# Altium PCB M2_Mosaic-G5_Smart.PcbDoc
Units mm, origin at the board's own origin, x right, y up, seen from the top; angles counter-clockwise.
Board outline 22 x 30 mm, 4 copper layers (Top Layer, Layer 1, Layer 2, Bottom Layer), stack 0.705 mm thick; 16 components, 40 nets, 185 pads, 161 vias.
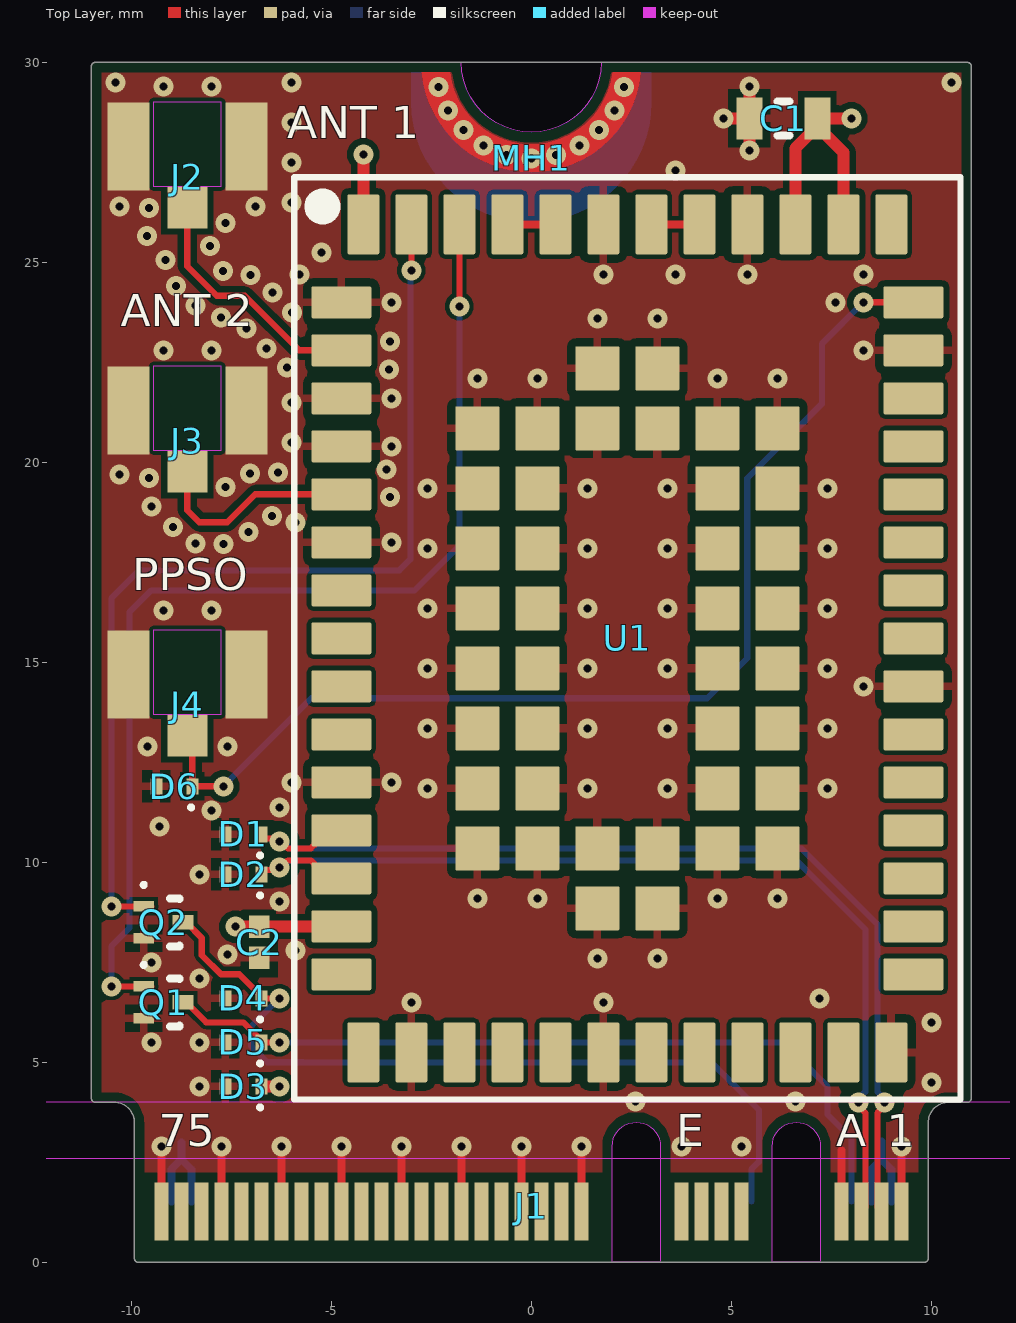
[diagram p0: Top Layer view]
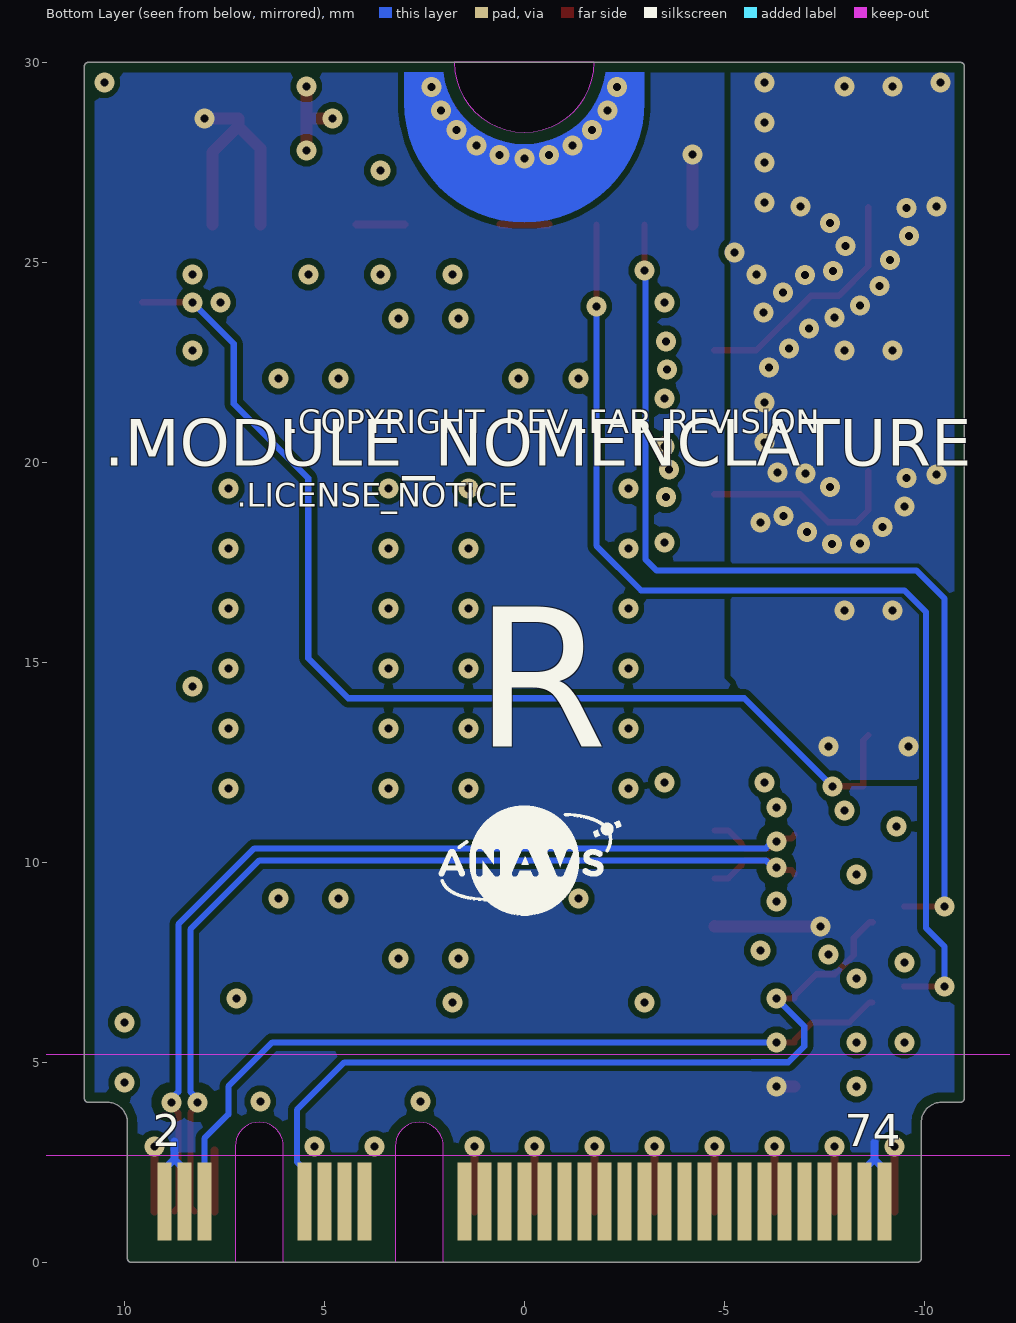
[diagram p1: Bottom Layer view, seen from below]
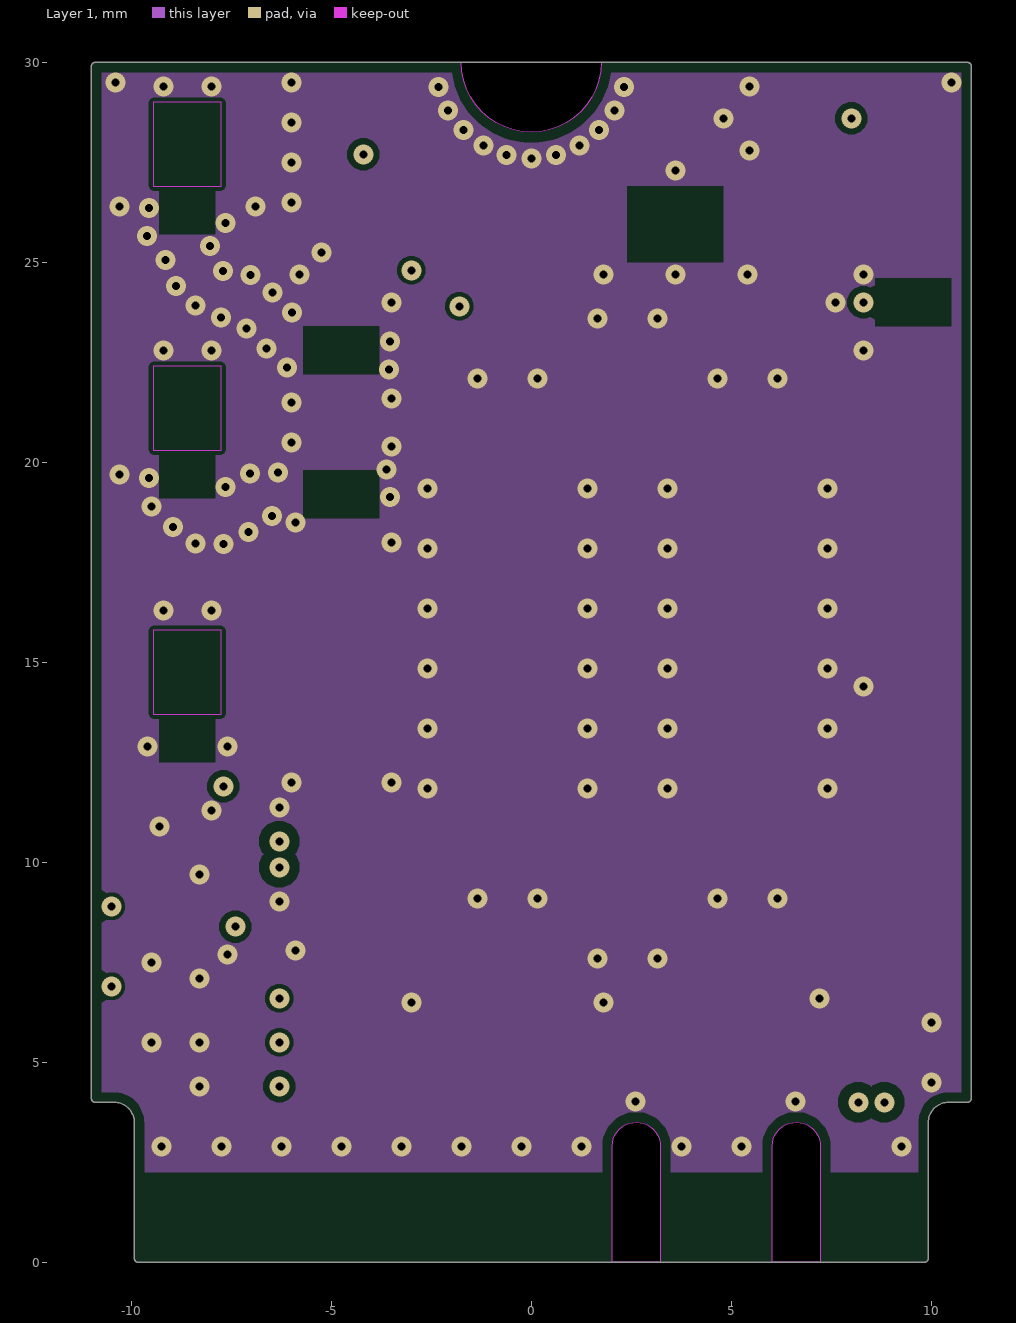
[diagram p2: Layer 1]
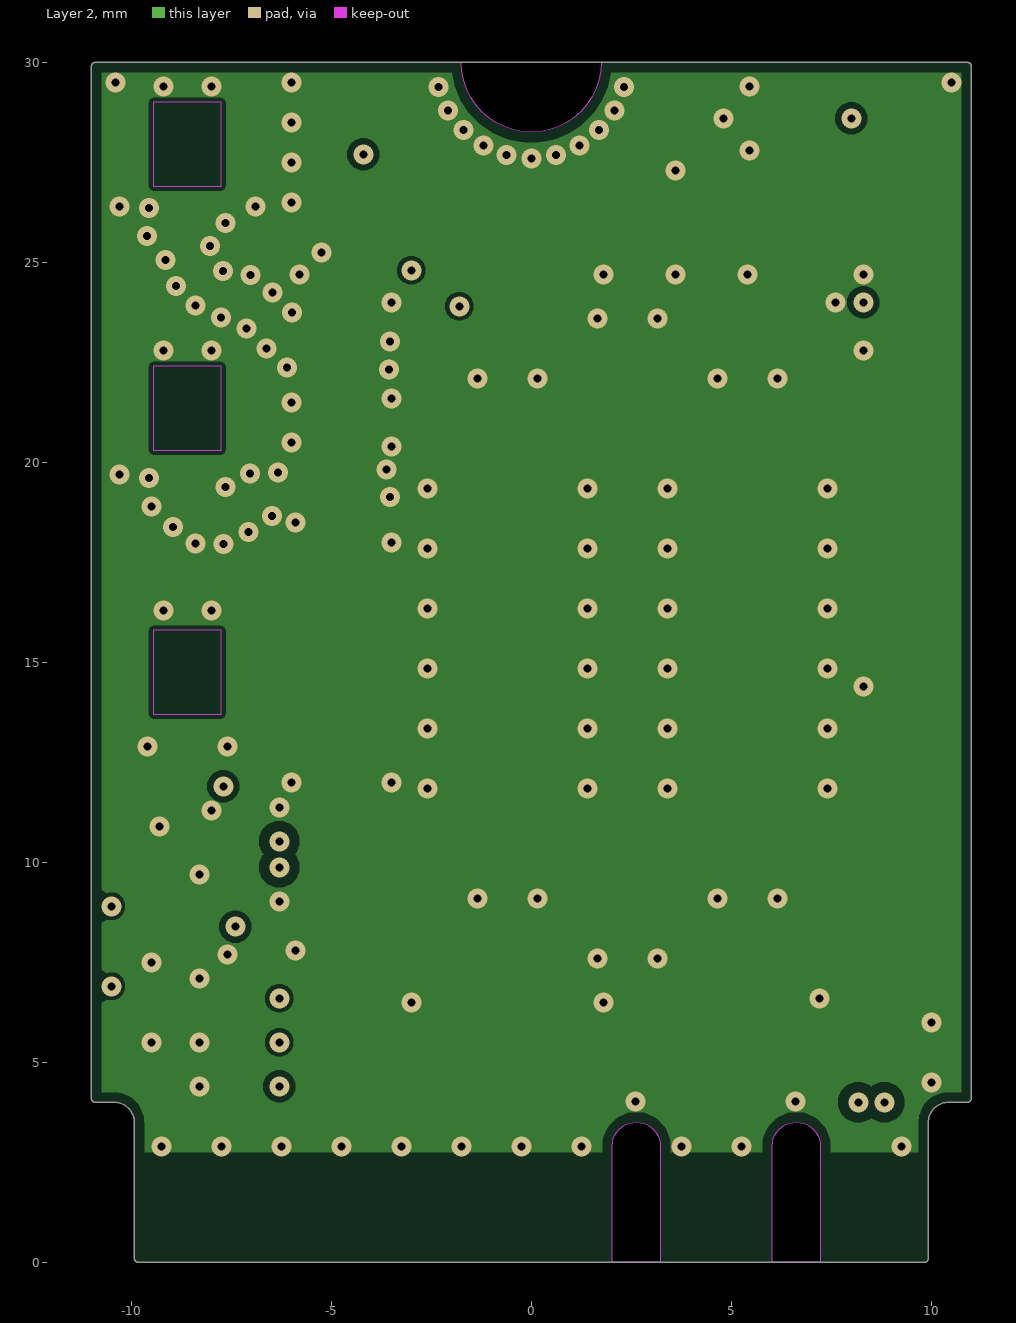
[diagram p3: Layer 2]
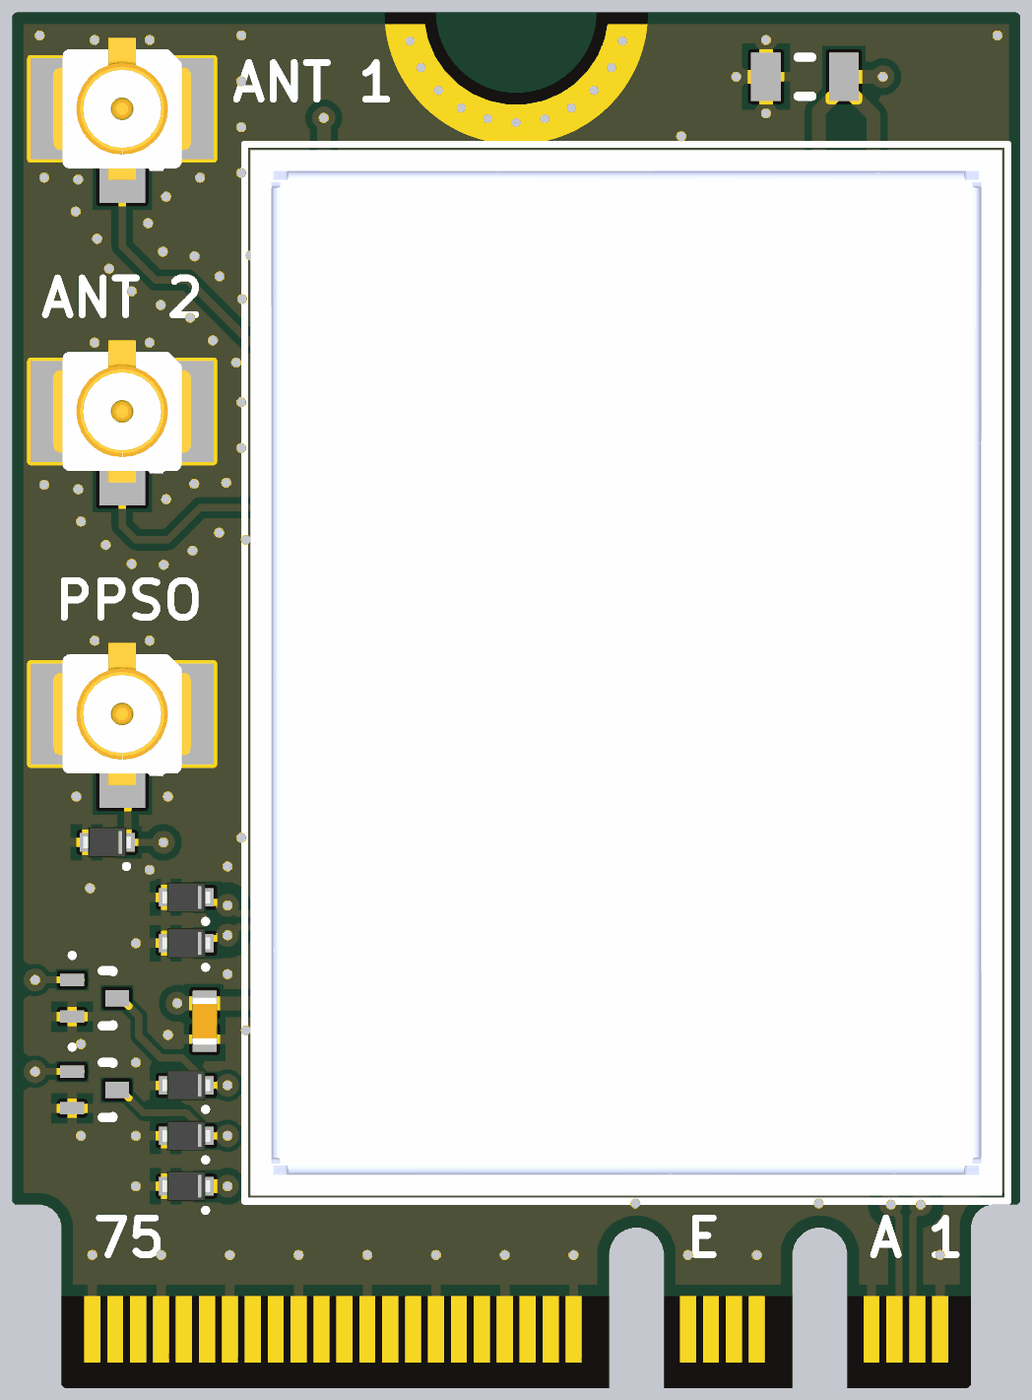
[diagram p4: 3D render of the assembled board from above, using the file's embedded part models]

## Layer stack, top to bottom
Top Solder: solder mask 0.04, Solder Resist, Dk 3.8
Top Layer: signal copper 0.036
Dielectric 2: prepreg 0.116, PP-006, Dk 4.2
Layer 1: signal copper 0.036
Dielectric 1: dielectric 0.329, FR-4, Dk 4.6
Layer 2: signal copper 0.036
Dielectric 3: prepreg 0.116, PP-006, Dk 4.2
Bottom Layer: signal copper 0.036
Bottom Solder: solder mask 0.04, Solder Resist, Dk 3.8

## Board outline
11,4.1 cw(c10.9,4.1) 10.9,4 10.425,4 ccw(c10.425,3.5) 9.925,3.5 9.925,0.1 cw(c9.825,0.1) 9.825,0 9.8,0 -9.825,0 cw(c-9.825,0.1) -9.925,0.1 -9.925,3.5 ccw(c-10.425,3.5) -10.425,4 -10.9,4 cw(c-10.9,4.1) -11,4.1 -11,29.9 cw(c-10.9,29.9) -10.9,30 10.9,30 cw(c10.9,29.9) 11,29.9

## Design rules (kind name [scope] priority, off if disabled: settings)
AssemblyTestPointUsage [All] p1 off:
AssemblyTestpoint [All] p1 off: testpointundercomponent=TRUE minsize=1.016 maxsize=2.54 preferedsize=1.524 minholesize=0 maxholesize=1.016 preferedholesize=0.813 testpointgrid=0.025 usegrid=TRUE gridtolerance=0 allowsidetop=TRUE allowsidebottom=TRUE
BoardOutlineClearance BoardOutlineClearance_1 [OnLayer('Top Overlay')] p1: gap=0 ignorepadtopadclearanceinfootprint=FALSE
BoardOutlineClearance [All] p2: gap=0.25 ignorepadtopadclearanceinfootprint=FALSE except(0: Arc-SplitContinuation Track-SplitContinuation SMDPad-SplitContinuation THPad-SplitContinuation Via-SplitContinuation Fill-SplitContinuation Poly-SplitContinuation Region-SplitContinuation Text-SplitContinuation)
Clearance Clearance_RF [InNetClass('RF')] p1: gap=0.15 ignorepadtopadclearanceinfootprint=FALSE
Clearance Clearance_DiffPairs [InNetClass('USB2.0')] p2: gap=0.15 ignorepadtopadclearanceinfootprint=FALSE except(0.14: SMDPad-SMDPad; 0.25: Via-Fill Via-Poly Via-Region) // USB2.0
Clearance Clearance_Power [InNetClass('Power')] p3: gap=0.15 ignorepadtopadclearanceinfootprint=FALSE except(0.14: SMDPad-SMDPad)
Clearance [All] p4: gap=0.1 ignorepadtopadclearanceinfootprint=FALSE
ComponentClearance [All] p1: gap=0.1 collisioncheckmode=3 verticalgap=0.2 showdistances=TRUE donotcheckwithout3dbody=TRUE
DiffPairsRouting DiffPairsRouting_USB2.0 [InDifferentialPair('USB')] p1: maxlimit=0.165 minlimit=0.15 mostfreqgap=0.165 toplayer_maxgap=0.15 toplayer_prefgap=0.15 toplayer_minwidth=0.15 toplayer_maxwidth=0.15 toplayer_prefwidth=0.15 bottomlayer_maxgap=0.15 bottomlayer_prefgap=0.15 bottomlayer_minwidth=0.15 bottomlayer_maxwidth=0.15 bottomlayer_prefwidth=0.15 impedanceprofiledriven=TRUE impedanceprofileid={B69DEC2E-AF19-444C-88DA-72D75EDAD83A} impedanceprofilevalue=90.000000 maxuncoupledlength=10
FabricationTestPointUsage [All] p1 off: valid=0 allowmultiple=FALSE
FabricationTestpoint [All] p1 off: side=3 testpointundercomponent=TRUE minsize=1.016 maxsize=2.54 preferedsize=1.524 minholesize=0 maxholesize=1.016 preferedholesize=0.813 testpointgrid=0.025 allowsidetop=TRUE allowsidebottom=TRUE usegrid=TRUE gridtolerance=0
Height Height_M2_Bottom [Layer = 'Bottom Layer'] p1: minheight=0 maxheight=1.3 prefheight=1
Height [All] p2: minheight=0 maxheight=25.4 prefheight=12.7
HoleSize [All] p1: absolutevalues=TRUE maxlimit=7 minlimit=0.1 maxpercent=80.000 minpercent=20.000
HoleToHoleClearance [All] p1: gap=0.2 allowstackedmicrovias=TRUE
MinimumAnnularRing [All] p1: minimumring=0.05
MinimumSolderMaskSliver [All] p1 off: minsoldermaskwidth=0.05
PlaneClearance [All] p1: clearance=0.35
PlaneConnect [All] p1: planeconnectstyle=Relief reliefexpansion=0.4 reliefentries=4 reliefconductorwidth=0.4 reliefairgap=0.2
PolygonConnect PolygonConnect_MH1 [HasFootprint('M.2 Mechanical Ground Pad Footprint')] p1: connectstyle=Direct reliefconductorwidth=0.254 reliefentries=4 polygonreliefangle="90 Angle" airgapwidth=0.254
PolygonConnect PolygonConnect_UMRF [(InComponent('J2') OR InComponent('J3') OR InComponent('J4'))] p2: connectstyle=Direct reliefconductorwidth=0.254 reliefentries=4 polygonreliefangle="90 Angle" airgapwidth=0.254
PolygonConnect [All] p3: thpad.connectstyle=Relief thpad.reliefconductorwidth=0.2 thpad.reliefentries=4 thpad.polygonreliefangle="45 Angle" thpad.airgapwidth=0.2 smdpad.connectstyle=Relief smdpad.reliefconductorwidth=0.2 smdpad.reliefentries=4 smdpad.polygonreliefangle="90 Angle" smdpad.airgapwidth=0.2 via.connectstyle=Direct via.reliefconductorwidth=0.2 via.reliefentries=4 via.polygonreliefangle="45 Angle" via.airgapwidth=0.2
ReturnPath [InNetClass('Antenna feed')] p1: impedanceprofileid={910BEB83-2EAD-482F-BD02-55335FFF49CD} _gaplimit=0
RoutingVias [All] p1: holewidth=0.15 width=0.25 viastyle="Through Hole" minholewidth=0.15 minwidth=0.25 maxholewidth=0.3 maxwidth=0.5
SilkToSilkClearance [All] p1 off: silktosilkclearance=0.02
SilkToSolderMaskClearance SilkToSolderMaskClearance_MH [HasFootprint('M.2 Mechanical Ground Pad Footprint')] p1: minsilkscreentomaskgap=0 clearancetoexposedcopper=TRUE
SilkToSolderMaskClearance SilkscreenOverComponentPads [IsPad] p2: minsilkscreentomaskgap=0.1 clearancetoexposedcopper=TRUE
SolderMaskExpansion SolderMaskExpansion_Tented [(ObjectKind = 'Via') And (AsMM(HoleDiameter) <= 0.2)] p1: expansion=0.102 istentingtop=TRUE
SolderMaskExpansion [All] p2: expansion=0.075 istentingtop=FALSE
UnRoutedNet [All] p1: checkbadconnections=TRUE
Width Width_RF_50R [InNetClass('RF')] p1: maxlimit=0.16 minlimit=0.127 preferedwidth=0.16 toplayer_minwidth=0.16 bottomlayer_minwidth=0.16 impedanceprofiledriven=TRUE impedanceprofileid={D78B447D-B8A2-4171-B246-AE72857CA4C4} impedanceprofilevalue=50.000000 minimp=50.000000 maximp=50.000000 favimp=50.000000
Width Width_Power [InNetClass('Power')] p2: maxlimit=2 minlimit=0.2 preferedwidth=0.45
Width [All] p3: maxlimit=2 minlimit=0.1 preferedwidth=0.2
15 further rules are at their usual default settings.

## Classes and differential pairs
component class Cover_Page: UF1
net class RF: NetD6_1 NetJ2_1 NetJ3_1
net class USB2.0: USB_N USB_P
component class Mosaic-G5: C1 C2 D6 J2 J3 J4 U1
net class Power: +3.3V
component class M.2_Key_A+E_Card: D1 D2 D3 D4 D5 J1 MH1 Q1 Q2
differential pair USB: +USB_P -USB_N

## Components (designator, comment, footprint, x,y, rotation, side; value= is the part's Value field where it differs from the comment)
C1 "C1608X5R0J226M080AC" CAPC1608X100X20ML10 6.3,28.6 r0 top value=22uF
C2 "GCM155R71H104KE02D" CAP0402C -6.8,8 r90 top
D1 "ESD9R3.3ST5G" ONSC-SOD-923-2-514AB-01_V -7.2,10.7 r180 top value=0.9pF
D2 "ESD9R3.3ST5G" ONSC-SOD-923-2-514AB-01_V -7.2,9.7 r180 top value=0.9pF
D3 "ESD9R3.3ST5G" ONSC-SOD-923-2-514AB-01_V -7.2,4.4 r180 top value=0.9pF
D4 "ESD9R3.3ST5G" ONSC-SOD-923-2-514AB-01_V -7.2,6.6 r180 top value=0.9pF
D5 "ESD9R3.3ST5G" ONSC-SOD-923-2-514AB-01_V -7.2,5.5 r180 top value=0.9pF
D6 "ESD9R3.3ST5G" ONSC-SOD-923-2-514AB-01_V -8.925,11.9 r180 top value=0.9pF
J1 "M.2 Dual Key A+E" "M.2 Key A+E card-Footprint" 0,0 r0 top locked
J2 "636101112001" 63610111x001 -8.6,27.9 r0 top
J3 "636101112001" 63610111x001 -8.6,21.3 r0 top
J4 "636101112001" 63610111x001 -8.6,14.7 r0 top
MH1 "M.2 Mechanical Ground Pad" "M.2 Mechanical Ground Pad Footprint" 0,30 r0 top locked
Q1 "NTK3043NT1G" ONSC-SOT-723-3-631AA-01_V -9.2,6.5 r0 top
Q2 "NTK3043NT1G" ONSC-SOT-723-3-631AA-01_V -9.2,8.5 r0 top
U1 "mosaic-G5-GENERIC" mosaic-G5-GENERIC-Footprint 2.4,15.6 r0 top

## Footprints (in the part's own frame and the unit in brackets; to place one, negate y for a bottom-side part, rotate by r counter-clockwise, add the part's x,y. Pads: shape width x height; smd on the part's side, far side on the other; paste and mask are expansions set on the pad)
63610111x001 [mm] "RF CONNECTOR VERTICAL 1.25MM"
  rect 1x1.05 smd: 1(0,-1.525)
  rect 1.05x2.2 smd: 2(-1.475,0) 3(1.475,0)
  body extent -1.5,-1.55 1.5,1.55, height 1.25
CAP0402C [mm] "Chip Capacitor, 2-Leads, Body 1,00x0,50mm, IPC High Density"
  rect 0.56x0.52 smd: 1(-0.39,0) 2(0.39,0)
  body extent -0.53,-0.28 0.53,0.28, height 0.55
CAPC1608X100X20ML10 [mm] "Chip Capacitor, 2-Leads, Body 1.70x0.90mm, IPC Low Density"
  rect 0.65x1.05 smd: 1(-0.85,0) 2(0.85,0)
  silkscreen extent -0.15,-0.43 0.15,0.43, body extent -0.85,-0.45 0.85,0.45, height 1
"M.2 Key A+E card-Footprint" [mm]
  rect 0.35x1.45 smd paste-20 mask+0: 1(9.25,1.275) 3(8.75,1.275) 5(8.25,1.275) 7(7.75,1.275) 17(5.25,1.275) 19(4.75,1.275) 21(4.25,1.275) 23(3.75,1.275) 33(1.25,1.275) 35(0.75,1.275) 37(0.25,1.275) 39(-0.25,1.275) 41(-0.75,1.275) 43(-1.25,1.275) 45(-1.75,1.275) 47(-2.25,1.275) 49(-2.75,1.275) 51(-3.25,1.275) 53(-3.75,1.275) 55(-4.25,1.275) 57(-4.75,1.275) 59(-5.25,1.275) 61(-5.75,1.275) 63(-6.25,1.275) 65(-6.75,1.275) 67(-7.25,1.275) 69(-7.75,1.275) 71(-8.25,1.275) 73(-8.75,1.275) 75(-9.25,1.275)
  rect 0.35x1.95 smd far side paste-20 mask+0: 2(9,1.525) 4(8.5,1.525) 6(8,1.525) 16(5.5,1.525) 18(5,1.525) 20(4.5,1.525) 22(4,1.525) 32(1.5,1.525) 34(1,1.525) 36(0.5,1.525) 38(0,1.525) 40(-0.5,1.525) 42(-1,1.525) 44(-1.5,1.525) 46(-2,1.525) 48(-2.5,1.525) 50(-3,1.525) 52(-3.5,1.525) 54(-4,1.525) 56(-4.5,1.525) 58(-5,1.525) 60(-5.5,1.525) 62(-6,1.525) 64(-6.5,1.525) 66(-7,1.525) 68(-7.5,1.525) 70(-8,1.525) 72(-8.5,1.525) 74(-9,1.525)
  Top Layer keep-out region: -15.005,2.6 14.995,2.6 14.995,4 -15.005,4
  Bottom Layer keep-out region: -15.005,2.67 14.995,2.67 14.995,5.2 -15.005,5.2
  Keep-Out Layer board cut-out: 2.025,0 2.025,2.9 2.071,3.13 2.201,3.324 2.395,3.454 2.625,3.5 2.625,3.5 2.855,3.454 3.049,3.324 3.179,3.13 3.225,2.9 3.225,2.9 3.225,0
  Keep-Out Layer board cut-out: 6.025,0 6.025,2.9 6.071,3.13 6.201,3.324 6.395,3.454 6.625,3.5 6.625,3.5 6.855,3.454 7.049,3.324 7.179,3.13 7.225,2.9 7.225,2.9 7.225,0
"M.2 Mechanical Ground Pad Footprint" [mil]
  round 1 smd: 0(0,-94.49)
  Top Layer region: 107.79,-9.84 79.98,-9.84 66.24,-45.83 37.39,-71.36 0,-80.6 0,-80.6 -37.37,-71.42 -66.23,-45.95 -79.98,-10 -79.98,-9.84 -107.81,-9.84 -90.28,-59.7 -51.25,-95.34 0,-108.27 0,-108.27 51.2,-95.39 90.22,-59.84 107.79,-10.05
  Bottom Layer region: -118.11,-39.37 -109.12,-84.57 -83.52,-122.89 -45.2,-148.49 0,-157.48 0,-157.48 45.2,-148.49 83.52,-122.89 109.12,-84.57 118.11,-39.37 118.11,-39.37 118.11,-9.84 80,-9.84 66.29,-45.86 37.42,-71.39 0,-80.6 0,-80.6 -37.42,-71.39 -66.29,-45.86 -80,-9.84 -80,-9.84 -118.11,-9.84
  Keep-Out Layer board cut-out: 68.9,0 63.65,-26.37 48.72,-48.72 26.37,-63.65 0,-68.9 0,-68.9 -26.37,-63.65 -48.72,-48.72 -63.65,-26.37 -68.9,0 -68.9,0 0,0
mosaic-G5-GENERIC-Footprint [mm]
  rrect10% 1.5x0.8 smd paste+0 mask+0.05: 1(-7.15,8.4) 2(-7.15,7.2) 3(-7.15,6) 4(-7.15,4.8) 5(-7.15,3.6) 6(-7.15,2.4) 7(-7.15,1.2) 8(-7.15,0) 9(-7.15,-1.2) 10(-7.15,-2.4) 11(-7.15,-3.6) 12(-7.15,-4.8) 13(-7.15,-6) 14(-7.15,-7.2) 15(-7.15,-8.4) 28(7.15,-8.4) 29(7.15,-7.2) 30(7.15,-6) 31(7.15,-4.8) 32(7.15,-3.6) 33(7.15,-2.4) 34(7.15,-1.2) 35(7.15,0) 36(7.15,1.2) 37(7.15,2.4) 38(7.15,3.6) 39(7.15,4.8) 40(7.15,6) 41(7.15,7.2) 42(7.15,8.4)
  rrect10% 0.8x1.5 smd paste+0 mask+0.05: 16(-6.6,-10.35) 17(-5.4,-10.35) 18(-4.2,-10.35) 19(-3,-10.35) 20(-1.8,-10.35) 21(-0.6,-10.35) 22(0.6,-10.35) 23(1.8,-10.35) 24(3,-10.35) 25(4.2,-10.35) 26(5.4,-10.35) 27(6.6,-10.35) 43(6.6,10.35) 44(5.4,10.35) 45(4.2,10.35) 46(3,10.35) 47(1.8,10.35) 48(0.6,10.35) 49(-0.6,10.35) 50(-1.8,10.35) 51(-3,10.35) 52(-4.2,10.35) 53(-5.4,10.35) 54(-6.6,10.35)
  rrect5% 1.1x1.1 smd paste+0 mask+0.05: 55(-0.75,6.75) 56(0.75,6.75) 57(-3.75,5.25) 58(-2.25,5.25) 59(-0.75,5.25) 60(0.75,5.25) 61(2.25,5.25) 62(3.75,5.25) 63(-3.75,3.75) 64(-2.25,3.75) 65(2.25,3.75) 66(3.75,3.75) 67(-3.75,2.25) 68(-2.25,2.25) 69(2.25,2.25) 70(3.75,2.25) 71(-3.75,0.75) 72(-2.25,0.75) 73(2.25,0.75) 74(3.75,0.75) 75(-3.75,-0.75) 76(-2.25,-0.75) 77(2.25,-0.75) 78(3.75,-0.75) 79(-3.75,-2.25) 80(-2.25,-2.25) 81(2.25,-2.25) 82(3.75,-2.25) 83(-3.75,-3.75) 84(-2.25,-3.75) 85(2.25,-3.75) 86(3.75,-3.75) 87(-3.75,-5.25) 88(-2.25,-5.25) 89(-0.75,-5.25) 90(0.75,-5.25) 91(2.25,-5.25) 92(3.75,-5.25) 93(-0.75,-6.75) 94(0.75,-6.75)
  silkscreen extent -8.33,-11.53 8.33,11.53, body extent -8.2,-11.4 8.2,11.4, height 2.52
ONSC-SOD-923-2-514AB-01_V [mm] "SOD, 2-Leads, Body 0.8x0.6mm"
  rect 0.3x0.4 smd: 1(-0.45,0) 2(0.45,0)
  silkscreen extent -0.47,0.48 -0.37,0.57, body extent -0.52,-0.33 0.52,0.33, height 0.41
ONSC-SOT-723-3-631AA-01_V [mm] "SOT223, 3-Leads, Body 1.2x0.8mm, Pitch 0.4mm"
  rect 0.52x0.27 smd: 1(-0.49,0.4) 2(-0.49,-0.4)
  rect 0.52x0.36 smd: 3(0.49,0)
  silkscreen extent -0.54,-0.6 0.4,0.98, body extent -0.4,-0.6 0.4,0.6, height 0.55

## Part data
C1: library part CMP-001-00146-1, "MLCC, 22 uF, 0603, 6.3 V, 20%, X5R", Case Code (Imperial)=0603, Case Code (Metric)=1608, Dielectric=X5R, Dielectric Material=Ceramic, Max Operating Temperature=85°C, Min Operating Temperature=-55°C, Package Quantity=1, Tolerance=20%, Voltage=6.3V, Case/Package=0603, Depth=0.8mm, Height=0.8mm, Lead Free="Lead Free", Length=1.6mm, Mounting Technology="Surface Mount", Packaging="Tape and Reel", Reach SVHC Compliant=Unknown, RoHS Compliant=Yes, Series=C, Termination=SMD/SMT, Thickness=0.039inch, Voltage Rating=6.3V, Voltage Rating (DC)=6.3V, Weight=7.1E-05oz, Width=0.031inch
C2: library part CMP-001-00114-5, "MLCC, 100 nF, 0402, 50 V, 10%, X7R", Capacitance=100nF, Case Code (Imperial)=0402, Case Code (Metric)=1005, Dielectric=X7R, Max Operating Temperature=125°C, Min Operating Temperature=-55°C, Package Quantity=10000, Ratings=AEC-Q200, Tolerance=10%, Voltage=50V, Case/Package=0402, Height=0.5mm, Lead Free="Lead Free", Length=0.039inch, Mount="Surface Mount", Packaging="Tape and Reel", Reach SVHC Compliant=Yes, RoHS Compliant=Yes, Series=GCM, Termination=SMD/SMT, Thickness=0.022inch, Voltage Rating=50V, Voltage Rating (DC)=50V, Weight=0.000212oz, Width=0.02inch
D1 D2 D3 D4 D5 D6: library part CMP-004-00061-1, "ESD9R3.3S Series 4.8 V 0.5 pF Uni-Directional ESD Protection Diode - SOD-923", Breakdown Voltage=4.8V, Case/Package=SOD-923-2, Clamping Voltage=7.8V, Leakage Current=1nA, Max Operating Temperature=125°C, Max Power Dissipation=150mW, Max Surge Current=1A, Min Operating Temperature=-55°C, Operating Supply Voltage=3.3V, Package Quantity=8000, Power Line Protection=No, Test Current=1mA, Clamping Voltage-Max=7.8V, Depth=0.6mm, Diode Type=ZENER, Direction=Unidirectional, ESD Protection=Yes, Halogen Free="Halogen Free", Height=0.4mm, Lead Free="Lead Free", Length=0.8mm, Max Breakdown Voltage=4.8V, Max Reverse Leakage Current=1nA, Min Breakdown Voltage=4.8V, Number of Channels=1, Number of Elements=1, Number of Lines=1, Number of Unidirectional Channels=1, Packaging="Tape and Reel", Peak Pulse Current=1A, Peak Pulse Power=150mW, Pins=2, Polarity=Unidirectional, Radiation Hardening=No, Reach SVHC Compliant=No, Reverse Standoff Voltage=3.3V, Series=-, Termination=SMD/SMT, Width=0.65mm, Working Voltage=3.3V
J1: library part CMP-002-00134-7, "Golden finger, M.2 Key A+E, Dual, Staggered, Pitch 0.5mm", ClassName="Edge Connector", PCI Express M.2 Specification="Revision 4.0, Version 1.0"
J2 J3 J4: library part CMP-002-00136-2, "Rf Conn, Umrf, Jack, 50 Ohm, Pcb Rohs Compliant: Yes", Insulation Resistance=500MR, Max Operating Temperature=90°C, Min Operating Temperature=-40°C, Impedance=50R, Packaging="Tape and Reel"
MH1: library part CMP-00028-00011-5
Q1 Q2: library part CMP-013-00043-1, "Single N-Channel Small Signal MOSFET with ESD Protection 20V, 285mA, 3.4Ω", Case/Package=SOT-723-3, Continuous Drain Current (ID)=210mA, Current Rating=225mA, Drain to Source Breakdown Voltage=20V, Drain to Source Resistance=3.4R, Gate to Source Voltage (Vgs)=10V, Input Capacitance=11pF, Max Operating Temperature=150°C, Max Power Dissipation=310mW, Min Operating Temperature=-55°C, Package Quantity=4000, Power Dissipation=440mW, Threshold Voltage=400mV, Drain to Source Voltage (Vdss)=20V, Drain-source On Resistance-Max=3.4R, Element Configuration=Single, Fall Time=15ns, Height=0.55mm, Lead Free="Lead Free", Length=1.25mm, Number of Elements=1, Packaging="Tape and Reel", Pins=3, Polarity=N-CHANNEL, Radiation Hardening=No, Rds On Max=3.4R, Reach SVHC Compliant=No, Rise Time=15ns, RoHS Compliant=Yes, Series=-, Turn-Off Delay Time=94ns, Turn-On Delay Time=13ns, Voltage Rating (DC)=20V, Width=0.85mm
U1: library part CMP-00025-00009-1, "mosaic-G5 GNSS Module - Low-power multi-band multi-constellation GNSS receiver.", Manufacturer=septentrio, Max Operating Temperature=+85°C, Max Power Consumption=785mW, Max RF input power at ANT_1=20dBm, Max RF input power at ANT_2=10dBm, Min Operating Temperature=-40°C, Min Storage Temperature=-55°C, Peak Current Consumption=500mA, Feature 1="dual antenna", Feature 2="10 MHz in", Max Storage Temperature=+85°C, Weight=2.2g

## Via types
v1: diameter 0.5, hole 0.2, Top Layer to Bottom Layer, tented both sides, 161 vias

## Nets (pads, with @x,y where several pads share a name; then routed paths per layer and width w, separated by ;. In a path a pad name is that pad's centre, name@x,y a point inside that pad or via, vN(x,y) a via of type N, cw(c..) or ccw(c..) an arc to the next point about the centre after c; other vN are vias at no path point)
+3.3V: C1.2 C2.2 D3.1 J1.2 J1.4 J1.72 J1.74 U1.14 U1.44 U1.45 U1.54 | length 16.8
  Top Layer w0.3: v1(-7.4,8.39) C2.2 -4.755,8.39 -4.755,8.395 U1.14 U1.14@-4.753,8.403 ; D3.1 v1(-6.3,4.4) ; U1.54 v1(-4.2,27.7) ; U1.45 6.6,27.85 C1.2@7.15,28.4 ; U1.44 7.8,27.75 C1.2@7.15,28.4 ; v1(8,28.6) C1.2 C1.2@7.15,28.4
  Bottom Layer w0.2: J1.74 -9,2.325 -8.75,2.575 ; -8.75,2.997 -8.75,2.575 ; J1.72 -8.5,2.325 -8.75,2.575 ; J1.4 8.5,2.325 8.75,2.575 ; 8.75,3.018 8.75,2.575 ; J1.2 9,2.325 8.75,2.575
GND: C1.1 C2.1 D1.2 D2.2 D3.2 D4.2 D5.2 D6.2 J1.1 J1.7 J1.33 J1.39 J1.45 J1.51 J1.57 J1.63 J1.69 J1.75 J2.2 J2.3 J3.2 J3.3 J4.2 J4.3 MH1.0 Q1.2 Q2.2 U1.1 U1.3 U1.4 U1.6 U1.11 U1.17 U1.21 U1.27 U1.34 U1.41 U1.46 U1.49 U1.55 U1.56 U1.57 U1.58 U1.59 U1.60 U1.61 U1.62 U1.63 U1.64 U1.65 U1.66 U1.67 U1.68 U1.69 U1.70 U1.71 U1.72 U1.73 U1.74 U1.75 U1.76 U1.77 U1.78 U1.79 U1.80 U1.81 U1.82 U1.83 U1.84 U1.85 U1.86 U1.87 U1.88 U1.89 U1.90 U1.91 U1.92 U1.93 U1.94 | length 17.5
  Top Layer w0.2: J1.75 v1@-9.25,2.8 ; J1.69 v1@-7.75,2.8 ; J1.63 v1@-6.25,2.8 ; J1.57 v1@-4.75,2.8 ; J1.51 v1@-3.25,2.8 ; J1.45 v1@-1.75,2.8 ; J1.39 v1@-0.25,2.8 ; J1.33 v1@1.25,2.8 ; J1.7 7.75,2.8 ; J1.1 v1@9.25,2.8
  Top Layer w0.3: v1(4.8,28.6) C1.1 ; v1(5.45,27.8) C1.1 ; v1(5.45,29.4) C1.1
  other v1: -9.25,2.9 -7.75,2.9 -6.25,2.9 -4.75,2.9 -3.25,2.9 -1.75,2.9 -0.25,2.9 1.25,2.9 3.75,2.9 5.25,2.9 9.25,2.9 2.6,4.025 6.6,4.025 -8.3,4.4 10,4.5 -9.5,5.5 -8.3,5.5 10,6 -3,6.5 1.8,6.5 7.2,6.6 -8.3,7.1 -9.5,7.5 1.65,7.6 3.15,7.6 -7.6,7.7 -5.9,7.8 -6.3,9.025 -1.35,9.1 0.15,9.1 4.65,9.1 6.15,9.1 -8.3,9.7 -9.3,10.9 -8,11.3 -6.3,11.375 -2.6,11.85 1.4,11.85 3.4,11.85 7.4,11.85 -6,12 -3.5,12 -9.6,12.9 -7.6,12.9 -2.6,13.35 1.4,13.35 3.4,13.35 7.4,13.35 8.3,14.4 -2.6,14.85 1.4,14.85 3.4,14.85 7.4,14.85 -9.2,16.3 -8,16.3 -2.6,16.35 1.4,16.35 3.4,16.35 7.4,16.35 -2.6,17.85 1.4,17.85 3.4,17.85 7.4,17.85 -7.693,17.955 -8.393,17.973 -3.5,18 -7.065,18.264 -8.958,18.386 -5.9,18.5 -6.484,18.655 -9.5,18.9 -3.538,19.127 -2.6,19.35 1.4,19.35 3.4,19.35 7.4,19.35 -7.641,19.384 -9.559,19.603 -10.3,19.7 -7.027,19.72 -6.328,19.745 -3.623,19.822 -3.5,20.4 -6,20.5 -6,21.5 -3.5,21.6 -1.35,22.1 0.15,22.1 4.65,22.1 6.15,22.1 -3.561,22.323 -6.113,22.365 -9.2,22.8 -8,22.8 8.3,22.8 -6.619,22.848 -3.538,23.023 -7.114,23.343 1.65,23.6 3.15,23.6 -7.757,23.62 -5.978,23.749 -8.39,23.919 -3.5,24 7.6,24 -6.473,24.244 -8.885,24.414 -7.019,24.682 -5.8,24.7 1.8,24.7 3.6,24.7 5.4,24.7 8.3,24.7 -7.712,24.783 -9.145,25.064 -5.25,25.25 -8.034,25.404 -9.614,25.659 -7.641,25.984 -9.559,26.358 -10.3,26.4 -6.9,26.4 -6,26.5 3.6,27.3 -6,27.5 0,27.6 -0.621,27.682 0.621,27.682 -1.2,27.922 1.2,27.922 -1.697,28.303 1.697,28.303 -6,28.5 -2.078,28.8 2.078,28.8 -9.2,29.4 -8,29.4 -2.318,29.379 2.318,29.379 -10.4,29.5 -6,29.5 10.5,29.5
Led1: Q1.1 U1.52 | length 27.5
  Top Layer w0.15: v1(-10.5,6.9) Q1.1@-9.49,6.9 ; v1(-1.8,23.9) U1.52
  Bottom Layer w0.15: v1(-10.5,6.9) -10.5,7.9 -10.04,8.36 -10.04,16.26 -9.5,16.8 -2.916,16.8 -1.8,17.916 v1(-1.8,23.9)
Led2: Q2.1 U1.53 | length 25
  Top Layer w0.15: v1(-10.5,8.9) Q2.1 Q2.1@-9.49,8.9 ; v1(-3,24.8) U1.53
  Bottom Layer w0.15: v1(-10.5,8.9) -10.5,16.6 -9.8,17.3 -3.3,17.3 -3.025,17.575 -3.025,24.775 v1(-3,24.8)
NetD4_1: D4.1 J1.16 Q2.3 | length 20.7
  Top Layer w0.15: D4.1 v1(-6.3,6.6)
  Top Layer w0.16: Q2.3 -8.63,8.5 -8.238,8.108 -8.238,7.679 -7.759,7.2 -7.3,7.2 -6.75,6.65 D4.1
  Bottom Layer w0.15: -5.7,5 4.5,5 5.688,3.812 5.688,2.513 5.5,2.325 J1.16
  Bottom Layer w0.16: v1(-6.3,6.6) -7,5.9 -7,5.4 -6.6,5 -5.7,5
NetD5_1: D5.1 J1.6 Q1.3 | length 20.1
  Top Layer w0.15: Q1.3 -8.63,6.5 -8.13,6 -7.2,6 -6.75,5.55 D5.1 v1(-6.3,5.5)
  Bottom Layer w0.15: v1(-6.3,5.5) 6.3,5.5 7.4,4.4 7.4,3.7 8,3.1 J1.6
NetD6_1: D6.1 J4.1 U1.42 | length 27.9
  Top Layer w0.16: J4.1 -8.475,13.05 D6.1 v1(-7.7,11.9) ; v1(8.3,24) U1.42
  Bottom Layer w0.16: v1(-7.7,11.9) -5.5,14.1 4.4,14.1 5.4,15.1 5.4,19.6 7.267,21.467 7.267,22.967 v1(8.3,24)
NetJ2_1: J2.1 U1.2 | length 6.2
  Top Layer w0.16: J2.1 -8.6,24.9 -7.865,24.165 -7.165,24.165 -5.8,22.8 U1.2
NetJ3_1: J3.1 U1.5 | length 5.2
  Top Layer w0.16: J3.1 -8.6,18.8 -8.3,18.5 -7.6,18.5 -6.9,19.2 U1.5
NetU1_7: U1.7
NetU1_8: U1.8
NetU1_9: U1.9
NetU1_10: U1.10
NetU1_15: U1.15
NetU1_16: U1.16
NetU1_18: U1.18
NetU1_19: U1.19
NetU1_20: U1.20
NetU1_22: U1.22
NetU1_23: U1.23
NetU1_24: U1.24
NetU1_25: U1.25
NetU1_26: U1.26
NetU1_28: U1.28
NetU1_29: U1.29
NetU1_30: U1.30
NetU1_31: U1.31
NetU1_32: U1.32
NetU1_33: U1.33
NetU1_35: U1.35
NetU1_36: U1.36
NetU1_37: U1.37
NetU1_38: U1.38
NetU1_39: U1.39
NetU1_40: U1.40
NetU1_43: U1.43
NetU1_47: U1.47 U1.48 | length 1.2
  Top Layer w0.2: U1.48 U1.47
NetU1_50: U1.50 U1.51 | length 1.2
  Top Layer w0.2: U1.51 U1.50
USB_N: D2.1 J1.5 U1.13 | length 25
  Top Layer w0.15: D2.1 -6.75,9.733 -6.675,9.808 -6.367,9.808 v1(-6.3,9.875) -6.262,9.875 -6.087,10.05 -5.513,10.05 -5.425,9.962 -5.425,9.925 -5.1,9.6 U1.13 ; v1(8.175,4) 8.175,3.912 8.35,3.737 8.35,2.547 8.35,2.093 8.35,1.375 J1.5
  Bottom Layer w0.15: v1(-6.3,9.875) -6.212,9.875 -6.037,10.05 6.626,10.05 8.35,8.326 8.35,4.263 8.175,4.088 v1(8.175,4)
USB_P: D1.1 J1.3 U1.12 | length 25.5
  Top Layer w0.15: D1.1 -6.75,10.667 -6.675,10.592 -6.367,10.592 v1(-6.3,10.525) -6.262,10.525 -6.087,10.35 -5.513,10.35 -5.425,10.438 -5.425,10.475 -5.1,10.8 U1.12 ; J1.3 8.65,1.375 8.65,2.093 8.65,2.671 8.65,3.737 8.825,3.912 v1(8.825,4)
  Bottom Layer w0.15: v1(-6.3,10.525) -6.212,10.525 -6.037,10.35 6.75,10.35 8.65,8.45 8.65,4.263 8.825,4.088 v1(8.825,4)
pads on no net: J1.17 J1.18 J1.19 J1.20 J1.21 J1.22 J1.23 J1.32 J1.34 J1.35 J1.36 J1.37 J1.38 J1.40 J1.41 J1.42 J1.43 J1.44 J1.46 J1.47 J1.48 J1.49 J1.50 J1.52 J1.53 J1.54 J1.55 J1.56 J1.58 J1.59 J1.60 J1.61 J1.62 J1.64 J1.65 J1.66 J1.67 J1.68 J1.70 J1.71 J1.73

## Polygon pours and split planes (outlines as drawn)
GND on Layer 1 "NONET_L-01_P-001" (solid, pour order 0): -11,30 11,30 11,2.25 -11,2.25
GND on Layer 2 "NONET_L-01_P-001" (solid, pour order 1): -11,30 11,30 11,2.75 -11,2.75
+3.3V on Bottom Layer "NONET_L-01_P-001" (solid, pour order 3): -5,14.6 -7.7,11.9 -11,11.9 -11,2.75 11,2.75 11,30 -5,30
GND on Bottom Layer "NONET_L-01_P-001" (solid, pour order 6): -7.7,11.9 -5,14.6 -5,30 -11,30 -11,11.9
GND on Top Layer "NONET_L-01_P-001" (solid, pour order 5): -11,30 11,30 11,2.25 -11,2.25

## Keep-outs
Top Layer:
  rectangle: -9.45,13.7 -7.75,15.8
  rectangle: -9.45,20.3 -7.75,22.4
  rectangle: -9.45,26.9 -7.75,29
Layer 1:
  rectangle: -9.45,13.7 -7.75,15.8
  rectangle: -9.45,20.3 -7.75,22.4
  rectangle: -9.45,26.9 -7.75,29
Layer 2:
  rectangle: -9.45,20.3 -7.75,22.4
  rectangle: -9.45,13.7 -7.75,15.8
  rectangle: -9.45,26.9 -7.75,29

## Other copper
Layer 1:
  pour cut-out: 3.6,25 4.8,25 4.8,26.9 3.6,26.9
  pour cut-out: 2.4,25 3.6,25 3.6,26.9 2.4,26.9
  pour cut-out: 8.6,24.6 8.6,23.4 10.5,23.4 10.5,24.6
  pour cut-out: -5.7,19.8 -5.7,18.6 -3.8,18.6 -3.8,19.8
  pour cut-out: -5.7,23.4 -5.7,22.2 -3.8,22.2 -3.8,23.4
  pour cut-out: -9.3,27.1 -9.3,25.7 -7.9,25.7 -7.9,27.1
  pour cut-out: -9.3,13.9 -9.3,12.5 -7.9,12.5 -7.9,13.9
  pour cut-out: -9.3,20.5 -9.3,19.1 -7.9,19.1 -7.9,20.5

## Silkscreen, mask and mechanical layers (free items; w line width, h text height)
Top Overlay:
  text "ANT 1" at -6.099,28.1 h0.8
  text "ANT 2" at -10.27,23.4 h0.8
  text "PPSO" at -9.973,16.8 h0.8
Bottom Overlay:
  drawing of 8 lines, arcs and shapes, not listed
  text ".COPYRIGHT, REV .FAB_REVISION" at 5.9,20.531 h1
  text ".MODULE_NOMENCLATURE" at 10.5,19.525 h2
  text ".LICENSE_NOTICE" at 7.184,18.694 h1
  text "R" at 1.25,11.737 h6
Mechanical 1:
  lines w0.01: -11,4.08 -11,4.1 -11,29.9 -11,29.92 -10.985,29.957 -10.957,29.985 -10.92,30 -10.9,30 -1.75,30 -1.75,29.828 -1.683,29.49 -1.551,29.171 -1.359,28.884 -1.116,28.641 -0.829,28.449 -0.51,28.317 -0.172,28.25 0.172,28.25 0.51,28.317 0.829,28.449 1.116,28.641 1.359,28.884 1.551,29.171 1.683,29.49 1.75,29.828 1.75,30 10.9,30 10.92,30 10.957,29.985 10.985,29.957 11,29.92 11,29.9 11,4.1 11,4.08 10.985,4.043 10.957,4.015 10.92,4 10.9,4 10.425,4 10.327,3.99 10.147,3.916 10.009,3.778 9.935,3.598 9.925,3.5 9.925,0.1 9.925,0.08 9.91,0.043 9.882,0.015 9.845,0 9.825,0 9.8,0 7.225,0 7.225,2.9 7.225,3.019 7.134,3.24 6.965,3.409 6.744,3.5 6.506,3.5 6.285,3.409 6.116,3.24 6.025,3.019 6.025,2.9 6.025,0 3.225,0 3.225,2.9 3.225,3.019 3.134,3.24 2.965,3.409 2.744,3.5 2.506,3.5 2.285,3.409 2.116,3.24 2.025,3.019 2.025,2.9 2.025,0 -9.825,0 -9.845,0 -9.882,0.015 -9.91,0.043 -9.925,0.08 -9.925,0.1 -9.925,3.5 -9.935,3.598 -10.009,3.778 -10.147,3.916 -10.327,3.99 -10.425,4 -10.9,4 -10.92,4 -10.957,4.015 -10.985,4.043 -11,4.08

## Text inside footprints (layer, text, board x,y; h text height)
J1: Bottom Overlay "2" at 9.29,2.9 h0.8; Bottom Overlay "74" at -8.01,2.9 h0.8; Dimensions "AREA RESERVED FOR RF RECEPACLES OR COMPONENT WHEN NO RF RECEPTACLES USED" at 3.2,26.2 h0.4; Top Overlay "A" at 7.625,2.9 h0.8; Top Overlay "E" at 3.625,2.9 h0.8; Top Overlay "1" at 8.89,2.9 h0.8; Top Overlay "75" at -9.31,2.9 h0.8
J2: Dimensions "Cutout  / prohibition  / area" at -9.65,27.55 h0.2
J3: Dimensions "Cutout  / prohibition  / area" at -9.65,20.95 h0.2
J4: Dimensions "Cutout  / prohibition  / area" at -9.65,14.35 h0.2
U1: Top 3D Body "*" at -3.682,23.365 h1.27